# EAGLE board OOBD-Cup_v5-EuroPCB (EAGLE 5.11), part 1 of 4
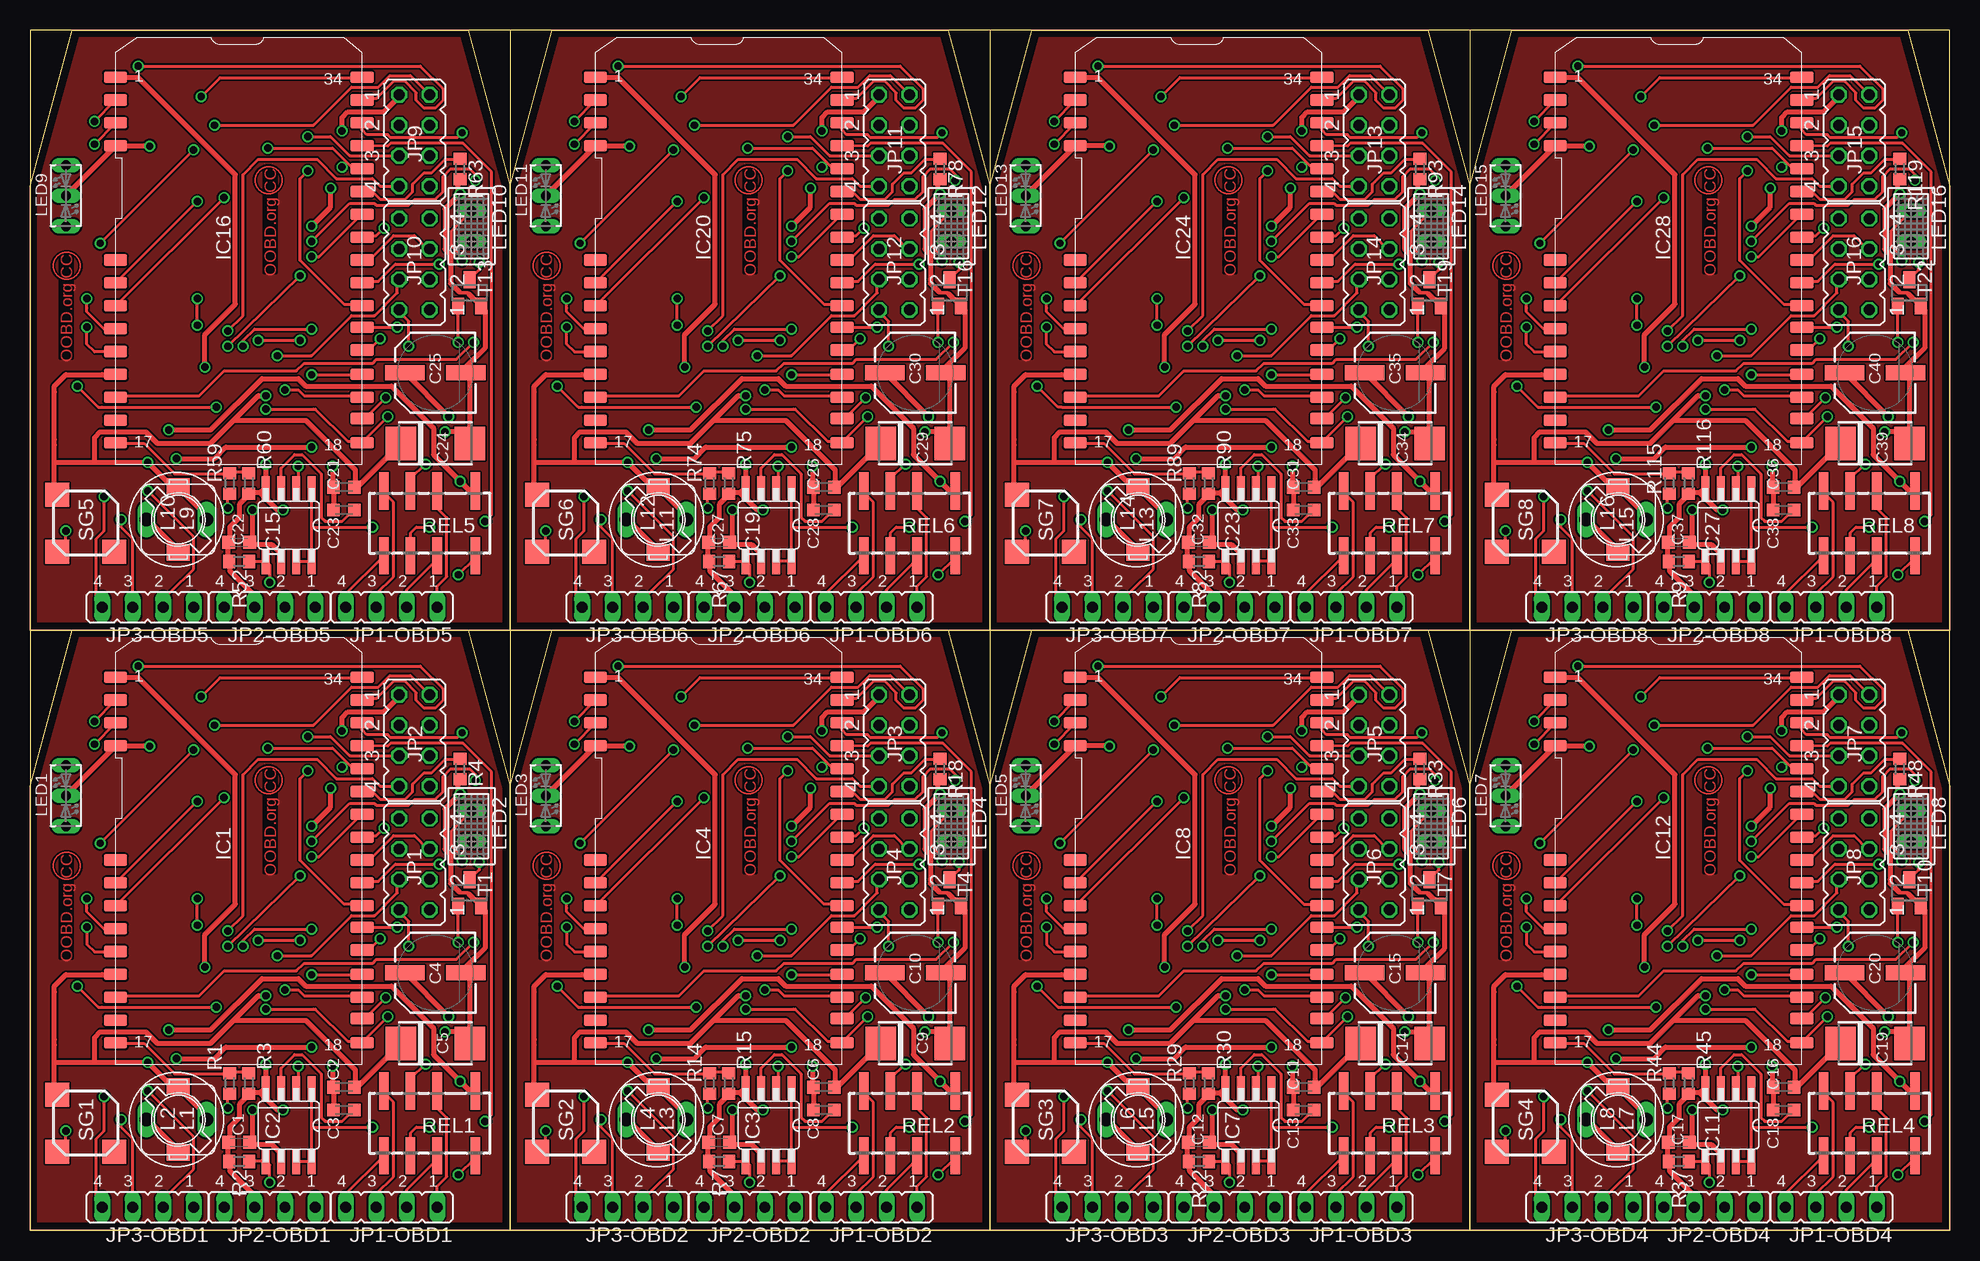
[diagram p0: board, top side]
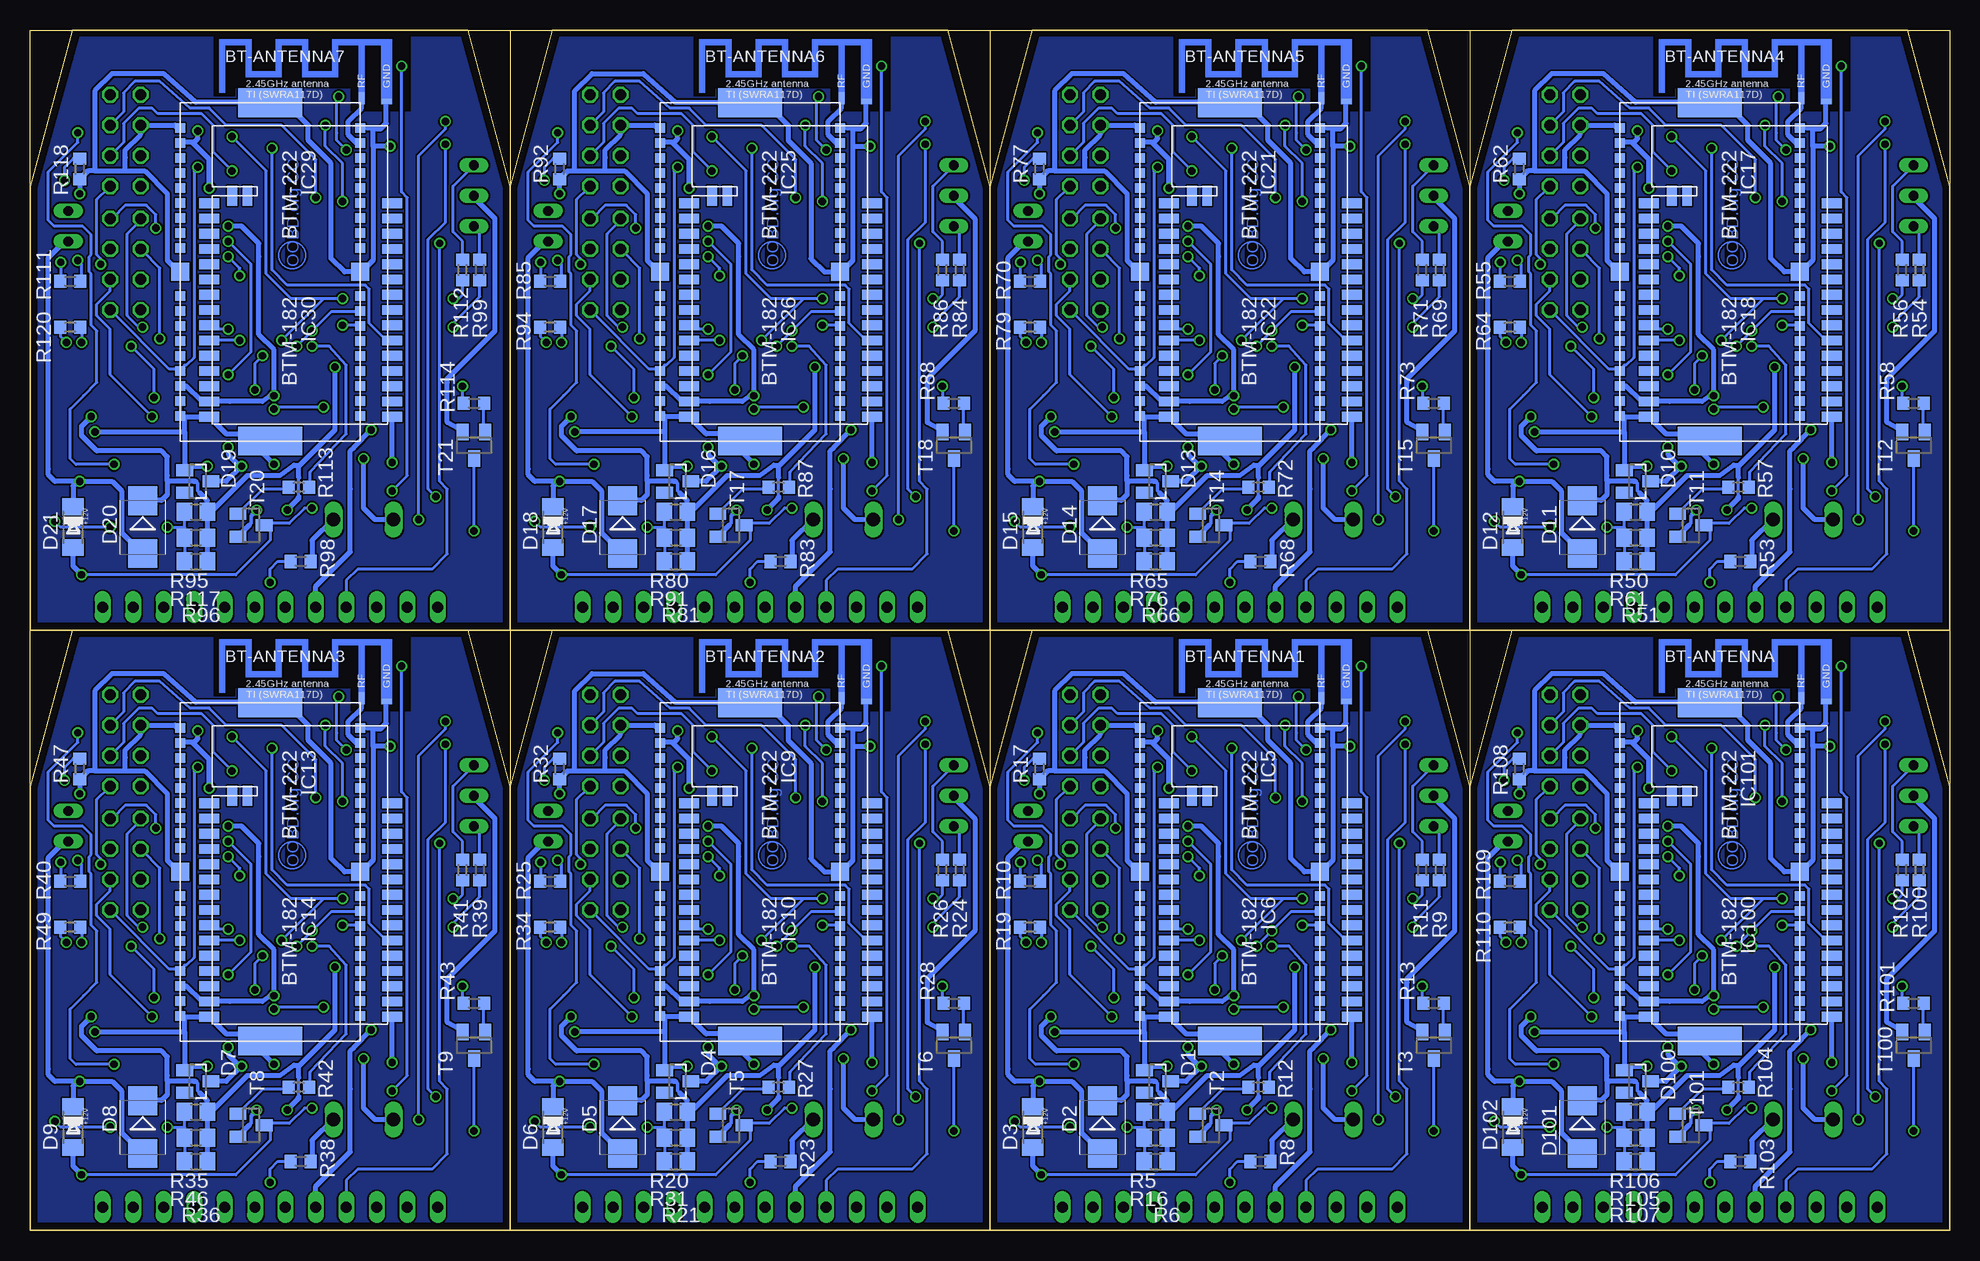
[diagram p1: board, bottom side, seen from below]

Size 160 x 100 mm. Coordinates in mm from the lower left corner, seen from the top.
Outline: 40,0 0,0
Outline: 0,0 0,37 3.5,50 36.5,50 40,37
Outline: 40,37 40,0
Outline: 80,0 40,0
Outline: 40,0 40,37
Outline: 40,37 43.5,50 76.5,50 80,37
Outline: 80,37 80,0
Outline: 120,0 80,0
Outline: 80,0 80,37
Outline: 80,37 83.5,50 116.5,50 120,37
Outline: 120,37 120,0
Outline: 160,0 120,0
Outline: 120,0 120,37
Outline: 120,37 123.5,50 156.5,50 160,37 160,0
Outline: 40,50 0,50 0,87 3.5,100 36.5,100 40,87
Outline: 40,87 40,50
Outline: 80,50 40,50
Outline: 40,50 40,87
Outline: 40,87 43.5,100 76.5,100 80,87
Outline: 80,87 80,50
Outline: 120,50 80,50
Outline: 80,50 80,87
Outline: 80,87 83.5,100 116.5,100 120,87
Outline: 120,87 120,50
Outline: 120,50 160,50 160,87 156.5,100 123.5,100 120,87
Outline: 120,50 120,87
Outline: 0,0 160,0
Outline: 160,0 160,100 0,100 0,0
Copper layers (1*16): Top 0.035mm / dielectric 1.5mm / Bottom 0.035mm
Design rules "multi-cb_035um-cu *": minimum track width 6mil, minimum drill 12mil, track to track 6mil, track to pad 6mil, pad to pad 6mil, via to via 6mil, smd to smd 6mil, copper to edge 20mil, drill to drill 8mil, minimum pad ring 8mil, minimum via ring 6mil, stop-mask expansion 3mil, vias tented up to drill 0mil, thermal gap 8mil
Milling: 16 lines

## Footprints (pad centres in the part's own frame; a part is rotated, then mirrored left to right if it is on the bottom)
SWRA117D_RIGHT = smd 0.813 x 0.406: GND -0.45,0.25 | smd 0.508 x 1.016: RF -2.55,0.5
C0603K = smd 1.05 x 1.08: 1 -0.875,0; 2 0.875,0
SV-D = smd 3.302 x 1.27: + -2.54,0; - 2.54,0
C6032-TE-C = smd 2.54 x 2.794: + 2.857,0; - -2.857,0
SOT23 = smd 1 x 1.4: 1 -0.95,-1.1; 2 0.95,-1.1; 3 0,1.1
SMB = smd 2.4 x 2.4: A 2.2,0; C -2.2,0
MINIMELF = smd 1.4 x 1.8: A 1.7,0; C -1.7,0
DMX1-MINI = smd 1.93 x 0.965: 1 0,32.258; 2 0,30.353; 3 0,28.448; 4 0,26.543; 9 0,17.018; 10 0,15.113; 11 0,13.208; 12 0,11.303; 13 0,9.398; 14 0,7.493; 15 0,5.588; 16 0,3.683; 17 0,1.778; 18 20.574,1.778; 19 20.574,3.81; 20 20.574,5.588; 21 20.574,7.493; 22 20.574,9.525; 23 20.574,11.43; 24 20.574,13.208; 25 20.574,15.113; 26 20.574,17.018; 27 20.574,18.923; 28 20.574,20.828; 29 20.574,22.733; 30 20.574,24.638; 31 20.574,26.543; 32 20.574,28.448; 33 20.574,30.353; 34 20.574,32.258
SO8 = smd 0.66 x 2.032: 1 -1.905,-3.073; 2 -0.635,-3.073; 3 0.635,-3.073; 4 1.905,-3.073; 5 1.905,3.073; 6 0.635,3.073; 7 -0.635,3.073; 8 -1.905,3.073
BTM-222 = smd 0.8 x 0.8: P$1 -12.635,-7.5; P$2 -11.385,-7.5; P$3 -10.135,-7.5; P$4 -8.885,-7.5; P$5 -7.635,-7.5; P$6 -6.385,-7.5; P$7 -5.135,-7.5; P$8 -3.885,-7.5; P$9 -2.635,-7.5; P$11 1.365,-7.5; P$12 2.615,-7.5; P$13 3.865,-7.5; P$14 5.115,-7.5; P$15 6.365,-7.5; P$16 7.615,-7.5; P$17 8.865,-7.5; P$18 10.115,-7.5; P$19 11.365,-7.5; P$20 11.365,7.5; P$21 10.115,7.5; P$22 8.865,7.5; P$23 7.615,7.5; P$24 6.365,7.5; P$25 5.115,7.5; P$26 3.865,7.5; P$27 2.615,7.5; P$28 1.365,7.5; P$30 -2.635,7.5; P$31 -3.885,7.5; P$32 -5.135,7.5; P$33 -6.385,7.5; P$34 -7.635,7.5; P$35 -8.885,7.5; P$36 -10.135,7.5; P$37 -11.385,7.5; P$38 -12.635,7.5 | smd 1.5 x 1.5: P$10 -0.635,-7.5; P$29 -0.635,7.5 | smd 2.4 x 5.3: P$AGND -14.735,0; P$BGND 13.465,0
BTM-182 = smd 1.676 x 0.813: P$1 -7.62,7.62; P$2 -7.62,6.35; P$3 -7.62,5.08; P$4 -7.62,3.81; P$5 -7.62,2.54; P$6 -7.62,1.27; P$7 -7.62,0; P$8 -7.62,-1.27; P$9 -7.62,-2.54; P$10 -7.62,-3.81; P$11 -7.62,-5.08; P$12 -7.62,-6.35; P$13 -7.62,-7.62; P$14 -7.62,-8.89; P$15 -7.62,-10.16; P$16 7.62,-10.16; P$17 7.62,-8.89; P$18 7.62,-7.62; P$19 7.62,-6.35; P$20 7.62,-5.08; P$21 7.62,-3.81; P$22 7.62,-2.54; P$23 7.62,-1.27; P$24 7.62,0; P$25 7.62,1.27; P$26 7.62,2.54; P$27 7.62,3.81; P$28 7.62,5.08; P$29 7.62,6.35; P$30 7.62,7.62 | smd 0.813 x 1.676: P$31 -4.445,8.255; P$32 -5.715,8.255
JP4Q = drill 0.914 octagon: 1 -3.81,-1.27; 2 -3.81,1.27; 3 -1.27,-1.27; 4 -1.27,1.27; 5 1.27,-1.27; 6 1.27,1.27; 7 3.81,-1.27; 8 3.81,1.27
JP4 = drill 0.914 long: 1 -3.81,0; 2 -1.27,0; 3 1.27,0; 4 3.81,0
07HCP-XXXX-50 = drill 1.1 long: 1 -2.5,0; 2 2.5,0
PIS2408 = smd 1.9 x 1.4: P$1 0,2.75; P$2 0,-2.75
DUOLED2X5 = drill 0.813 long: AG -2.54,0; AR 2.54,0; K 0,0
U57X32 = drill 0.813 long: A -1.27,0; K 1.27,0
R0603 = smd 1 x 1.1: 1 -0.85,0; 2 0.85,0
R0805 = smd 1.3 x 1.5: 1 -0.95,0; 2 0.95,0
FTR-B4GA = smd 0.8 x 3.1: 1 -3.8,-3.167; 2 -0.625,-3.167; 3 1.597,-3.167; 4 3.82,-3.167; 5 3.82,2.23; 6 1.597,2.23; 7 -0.625,2.23; 8 -3.8,2.23
BME0603SA = smd 2 x 2: (+)LEAD 4.295,0.425; (-)LEAD -0.475,0.425; NC -0.475,-4.345

## Placement (x,y rotation side)
BT-ANTENNA  [SWRA117D_RIGHT]  9.82,43.82 0 bottom
BT-ANTENNA1  [SWRA117D_RIGHT]  49.82,43.82 0 bottom
BT-ANTENNA2  [SWRA117D_RIGHT]  89.82,43.82 0 bottom
BT-ANTENNA3  [SWRA117D_RIGHT]  129.82,43.82 0 bottom
BT-ANTENNA4  [SWRA117D_RIGHT]  9.82,93.81 0 bottom
BT-ANTENNA5  [SWRA117D_RIGHT]  49.82,93.81 0 bottom
BT-ANTENNA6  [SWRA117D_RIGHT]  89.82,93.81 0 bottom
BT-ANTENNA7  [SWRA117D_RIGHT]  129.82,93.81 0 bottom
C1  100nF  [C0603K]  17.44,7.3 180 top
C2  1µF  [C0603K]  26.17,11.91 180 top
C3  270pF  [C0603K]  26.17,10 180 top
C4  47µ/35V  [SV-D]  33.79,21.43 0 top
C5  220µF  [C6032-TE-C]  33.79,15.56 180 top
C6  1µF  [C0603K]  66.17,11.91 180 top
C7  100nF  [C0603K]  57.44,7.3 180 top
C8  270pF  [C0603K]  66.17,10 180 top
C9  220µF  [C6032-TE-C]  73.79,15.56 180 top
C10  47µ/35V  [SV-D]  73.79,21.43 0 top
C11  1µF  [C0603K]  106.17,11.91 180 top
C12  100nF  [C0603K]  97.44,7.3 180 top
C13  270pF  [C0603K]  106.17,10 180 top
C14  220µF  [C6032-TE-C]  113.79,15.56 180 top
C15  47µ/35V  [SV-D]  113.79,21.43 0 top
C16  1µF  [C0603K]  146.17,11.91 180 top
C17  100nF  [C0603K]  137.44,7.3 180 top
C18  270pF  [C0603K]  146.17,10 180 top
C19  220µF  [C6032-TE-C]  153.79,15.56 180 top
C20  47µ/35V  [SV-D]  153.79,21.43 0 top
C21  1µF  [C0603K]  26.17,61.91 180 top
C22  100nF  [C0603K]  17.44,57.3 180 top
C23  270pF  [C0603K]  26.17,60 180 top
C24  220µF  [C6032-TE-C]  33.79,65.56 180 top
C25  47µ/35V  [SV-D]  33.79,71.43 0 top
C26  1µF  [C0603K]  66.17,61.91 180 top
C27  100nF  [C0603K]  57.44,57.3 180 top
C28  270pF  [C0603K]  66.17,60 180 top
C29  220µF  [C6032-TE-C]  73.79,65.56 180 top
C30  47µ/35V  [SV-D]  73.79,71.43 0 top
C31  1µF  [C0603K]  106.17,61.91 180 top
C32  100nF  [C0603K]  97.44,57.3 180 top
C33  270pF  [C0603K]  106.17,60 180 top
C34  220µF  [C6032-TE-C]  113.79,65.56 180 top
C35  47µ/35V  [SV-D]  113.79,71.43 0 top
C36  1µF  [C0603K]  146.17,61.91 180 top
C37  100nF  [C0603K]  137.44,57.3 180 top
C38  270pF  [C0603K]  146.17,60 180 top
C39  220µF  [C6032-TE-C]  153.79,65.56 180 top
C40  47µ/35V  [SV-D]  153.79,71.43 0 top
D1  BAS40  [SOT23]  66.01,12.38 270 bottom
D2  B140  [SMB]  70.62,8.57 270 bottom
D3  1N4148  [MINIMELF]  76.41,8.57 270 bottom
D4  BAS40  [SOT23]  106.01,12.38 270 bottom
D5  B140  [SMB]  110.62,8.57 270 bottom
D6  1N4148  [MINIMELF]  116.41,8.57 270 bottom
D7  BAS40  [SOT23]  146.01,12.38 270 bottom
D8  B140  [SMB]  150.62,8.57 270 bottom
D9  1N4148  [MINIMELF]  156.41,8.57 270 bottom
D10  BAS40  [SOT23]  26.01,62.38 270 bottom
D11  B140  [SMB]  30.62,58.57 270 bottom
D12  1N4148  [MINIMELF]  36.41,58.57 270 bottom
D13  BAS40  [SOT23]  66.01,62.38 270 bottom
D14  B140  [SMB]  70.62,58.57 270 bottom
D15  1N4148  [MINIMELF]  76.41,58.57 270 bottom
D16  BAS40  [SOT23]  106.01,62.38 270 bottom
D17  B140  [SMB]  110.62,58.57 270 bottom
D18  1N4148  [MINIMELF]  116.41,58.57 270 bottom
D19  BAS40  [SOT23]  146.01,62.38 270 bottom
D20  B140  [SMB]  150.62,58.57 270 bottom
D21  1N4148  [MINIMELF]  156.41,58.57 270 bottom
D100  BAS40  [SOT23]  26.01,12.38 270 bottom
D101  B140  [SMB]  30.62,8.57 270 bottom
D102  1N4148  [MINIMELF]  36.41,8.57 270 bottom
IC1  DXM1  [DMX1-MINI]  7.12,13.81 0 top
IC2  MC34063-SO  [SO8]  21.57,8.73 180 top
IC3  MC34063-SO  [SO8]  61.57,8.73 180 top
IC4  DXM1  [DMX1-MINI]  47.12,13.81 0 top
IC5  BTM-222  [BTM-222]  59.98,29.21 270 bottom
IC6  BTM-182  [BTM-182]  57.44,27.94 0 bottom
IC7  MC34063-SO  [SO8]  101.57,8.73 180 top
IC8  DXM1  [DMX1-MINI]  87.12,13.81 0 top
IC9  BTM-222  [BTM-222]  99.98,29.21 270 bottom
IC10  BTM-182  [BTM-182]  97.44,27.94 0 bottom
IC11  MC34063-SO  [SO8]  141.57,8.73 180 top
IC12  DXM1  [DMX1-MINI]  127.12,13.81 0 top
IC13  BTM-222  [BTM-222]  139.98,29.21 270 bottom
IC14  BTM-182  [BTM-182]  137.44,27.94 0 bottom
IC15  MC34063-SO  [SO8]  21.57,58.73 180 top
IC16  DXM1  [DMX1-MINI]  7.12,63.81 0 top
IC17  BTM-222  [BTM-222]  19.98,79.21 270 bottom
IC18  BTM-182  [BTM-182]  17.44,77.94 0 bottom
IC19  MC34063-SO  [SO8]  61.57,58.73 180 top
IC20  DXM1  [DMX1-MINI]  47.12,63.81 0 top
IC21  BTM-222  [BTM-222]  59.98,79.21 270 bottom
IC22  BTM-182  [BTM-182]  57.44,77.94 0 bottom
IC23  MC34063-SO  [SO8]  101.57,58.73 180 top
IC24  DXM1  [DMX1-MINI]  87.12,63.81 0 top
IC25  BTM-222  [BTM-222]  99.98,79.21 270 bottom
IC26  BTM-182  [BTM-182]  97.44,77.94 0 bottom
IC27  MC34063-SO  [SO8]  141.57,58.73 180 top
IC28  DXM1  [DMX1-MINI]  127.12,63.81 0 top
IC29  BTM-222  [BTM-222]  139.98,79.21 270 bottom
IC30  BTM-182  [BTM-182]  137.44,77.94 0 bottom
IC100  BTM-182  [BTM-182]  17.44,27.94 0 bottom
IC101  BTM-222  [BTM-222]  19.98,29.21 270 bottom
JP1  SPI / SD-Card  [JP4Q]  32.05,30.48 90 top
JP1-OBD1  [JP4]  30.14,1.91 180 top
JP1-OBD2  [JP4]  70.14,1.91 180 top
JP1-OBD3  [JP4]  110.14,1.91 180 top
JP1-OBD4  [JP4]  150.14,1.91 180 top
JP1-OBD5  [JP4]  30.14,51.91 180 top
JP1-OBD6  [JP4]  70.14,51.91 180 top
JP1-OBD7  [JP4]  110.14,51.91 180 top
JP1-OBD8  [JP4]  150.14,51.91 180 top
JP2  Program  [JP4Q]  32.05,40.8 270 top
JP2-OBD1  [JP4]  19.98,1.91 180 top
JP2-OBD2  [JP4]  59.98,1.91 180 top
JP2-OBD3  [JP4]  99.98,1.91 180 top
JP2-OBD4  [JP4]  139.98,1.91 180 top
JP2-OBD5  [JP4]  19.98,51.91 180 top
JP2-OBD6  [JP4]  59.98,51.91 180 top
JP2-OBD7  [JP4]  99.98,51.91 180 top
JP2-OBD8  [JP4]  139.98,51.91 180 top
JP3  Program  [JP4Q]  72.05,40.8 270 top
JP3-OBD1  [JP4]  9.82,1.91 180 top
JP3-OBD2  [JP4]  49.82,1.91 180 top
JP3-OBD3  [JP4]  89.82,1.91 180 top
JP3-OBD4  [JP4]  129.82,1.91 180 top
JP3-OBD5  [JP4]  9.82,51.91 180 top
JP3-OBD6  [JP4]  49.82,51.91 180 top
JP3-OBD7  [JP4]  89.82,51.91 180 top
JP3-OBD8  [JP4]  129.82,51.91 180 top
JP4  SPI / SD-Card  [JP4Q]  72.05,30.48 90 top
JP5  Program  [JP4Q]  112.05,40.8 270 top
JP6  SPI / SD-Card  [JP4Q]  112.05,30.48 90 top
JP7  Program  [JP4Q]  152.05,40.8 270 top
JP8  SPI / SD-Card  [JP4Q]  152.05,30.48 90 top
JP9  Program  [JP4Q]  32.05,90.8 270 top
JP10  SPI / SD-Card  [JP4Q]  32.05,80.48 90 top
JP11  Program  [JP4Q]  72.05,90.8 270 top
JP12  SPI / SD-Card  [JP4Q]  72.05,80.48 90 top
JP13  Program  [JP4Q]  112.05,90.8 270 top
JP14  SPI / SD-Card  [JP4Q]  112.05,80.48 90 top
JP15  Program  [JP4Q]  152.05,90.8 270 top
JP16  SPI / SD-Card  [JP4Q]  152.05,80.48 90 top
L1  47µH  [07HCP-XXXX-50]  12.2,9.21 180 top
L2  47uH  [PIS2408]  12.36,9.21 0 top
L3  47µH  [07HCP-XXXX-50]  52.2,9.21 180 top
L4  47uH  [PIS2408]  52.36,9.21 0 top
L5  47µH  [07HCP-XXXX-50]  92.2,9.21 180 top
L6  47uH  [PIS2408]  92.36,9.21 0 top
L7  47µH  [07HCP-XXXX-50]  132.2,9.21 180 top
L8  47uH  [PIS2408]  132.36,9.21 0 top
L9  47µH  [07HCP-XXXX-50]  12.2,59.21 180 top
L10  47uH  [PIS2408]  12.36,59.21 0 top
L11  47µH  [07HCP-XXXX-50]  52.2,59.21 180 top
L12  47uH  [PIS2408]  52.36,59.21 0 top
L13  47µH  [07HCP-XXXX-50]  92.2,59.21 180 top
L14  47uH  [PIS2408]  92.36,59.21 0 top
L15  47µH  [07HCP-XXXX-50]  132.2,59.21 180 top
L16  47uH  [PIS2408]  132.36,59.21 0 top
LED1  Rt/Gr  [DUOLED2X5]  2.99,36.2 90 top
LED2  Blue  [U57X32]  36.81,33.66 90 top
LED3  Rt/Gr  [DUOLED2X5]  42.99,36.2 90 top
LED4  Blue  [U57X32]  76.81,33.66 90 top
LED5  Rt/Gr  [DUOLED2X5]  82.99,36.2 90 top
LED6  Blue  [U57X32]  116.81,33.66 90 top
LED7  Rt/Gr  [DUOLED2X5]  122.99,36.2 90 top
LED8  Blue  [U57X32]  156.81,33.66 90 top
LED9  Rt/Gr  [DUOLED2X5]  2.99,86.19 90 top
LED10  Blue  [U57X32]  36.81,83.66 90 top
LED11  Rt/Gr  [DUOLED2X5]  42.99,86.19 90 top
LED12  Blue  [U57X32]  76.81,83.66 90 top
LED13  Rt/Gr  [DUOLED2X5]  82.99,86.19 90 top
LED14  Blue  [U57X32]  116.81,83.66 90 top
LED15  Rt/Gr  [DUOLED2X5]  122.99,86.19 90 top
LED16  Blue  [U57X32]  156.81,83.66 90 top
R1  180k  [R0603]  16.65,12.22 270 top
R2  3k3  [R0603]  17.44,5.71 180 top
R3  47k  [R0603]  18.23,12.22 90 top
R4  10k  [R0603]  35.85,38.42 270 top
R5  1R  [R0805]  66.17,9.84 0 bottom
R6  1R  [R0805]  66.17,5.71 0 bottom
R7  3k3  [R0603]  57.44,5.71 180 top
R8  5k6  [R0603]  57.44,5.71 0 bottom
R9  82R  [R0603]  42.52,30 90 bottom
R10  390R  [R0603]  76.65,29.05 180 bottom
R11  82R  [R0603]  43.95,30 90 bottom
R12  4K7  [R0603]  57.6,11.91 180 bottom
R13  4K7  [R0603]  42.99,18.89 0 bottom
R14  180k  [R0603]  56.65,12.22 270 top
R15  47k  [R0603]  58.23,12.22 90 top
R16  1R  [R0805]  66.17,7.7 0 bottom
R17  10k  [R0603]  75.86,38.42 270 bottom
R18  10k  [R0603]  75.86,38.42 270 top
R19  4K7  [R0603]  76.65,25.24 0 bottom
R20  1R  [R0805]  106.17,9.84 0 bottom
R21  1R  [R0805]  106.17,5.71 0 bottom
R22  3k3  [R0603]  97.44,5.71 180 top
R23  5k6  [R0603]  97.44,5.71 0 bottom
R24  82R  [R0603]  82.52,30 90 bottom
R25  390R  [R0603]  116.65,29.05 180 bottom
R26  82R  [R0603]  83.95,30 90 bottom
R27  4K7  [R0603]  97.6,11.91 180 bottom
R28  4K7  [R0603]  82.99,18.89 0 bottom
R29  180k  [R0603]  96.65,12.22 270 top
R30  47k  [R0603]  98.23,12.22 90 top
R31  1R  [R0805]  106.17,7.7 0 bottom
R32  10k  [R0603]  115.86,38.42 270 bottom
R33  10k  [R0603]  115.86,38.42 270 top
R34  4K7  [R0603]  116.65,25.24 0 bottom
R35  1R  [R0805]  146.17,9.84 0 bottom
R36  1R  [R0805]  146.17,5.71 0 bottom
R37  3k3  [R0603]  137.44,5.71 180 top
R38  5k6  [R0603]  137.44,5.71 0 bottom
R39  82R  [R0603]  122.52,30 90 bottom
R40  390R  [R0603]  156.65,29.05 180 bottom
R41  82R  [R0603]  123.95,30 90 bottom
R42  4K7  [R0603]  137.6,11.91 180 bottom
R43  4K7  [R0603]  122.99,18.89 0 bottom
R44  180k  [R0603]  136.65,12.22 270 top
R45  47k  [R0603]  138.23,12.22 90 top
R46  1R  [R0805]  146.17,7.7 0 bottom
R47  10k  [R0603]  155.86,38.42 270 bottom
R48  10k  [R0603]  155.86,38.42 270 top
R49  4K7  [R0603]  156.65,25.24 0 bottom
R50  1R  [R0805]  26.17,59.84 0 bottom
R51  1R  [R0805]  26.17,55.72 0 bottom
R52  3k3  [R0603]  17.44,55.72 180 top
R53  5k6  [R0603]  17.44,55.72 0 bottom
R54  82R  [R0603]  2.52,80 90 bottom
R55  390R  [R0603]  36.65,79.05 180 bottom
R56  82R  [R0603]  3.95,80 90 bottom
R57  4K7  [R0603]  17.6,61.91 180 bottom
R58  4K7  [R0603]  2.99,68.89 0 bottom
R59  180k  [R0603]  16.65,62.22 270 top
R60  47k  [R0603]  18.23,62.22 90 top
R61  1R  [R0805]  26.17,57.7 0 bottom
R62  10k  [R0603]  35.85,88.42 270 bottom
R63  10k  [R0603]  35.85,88.42 270 top
R64  4K7  [R0603]  36.65,75.24 0 bottom
R65  1R  [R0805]  66.17,59.84 0 bottom
R66  1R  [R0805]  66.17,55.72 0 bottom
R67  3k3  [R0603]  57.44,55.72 180 top
R68  5k6  [R0603]  57.44,55.72 0 bottom
R69  82R  [R0603]  42.52,80 90 bottom
R70  390R  [R0603]  76.65,79.05 180 bottom
R71  82R  [R0603]  43.95,80 90 bottom
R72  4K7  [R0603]  57.6,61.91 180 bottom
R73  4K7  [R0603]  42.99,68.89 0 bottom
R74  180k  [R0603]  56.65,62.22 270 top
R75  47k  [R0603]  58.23,62.22 90 top
R76  1R  [R0805]  66.17,57.7 0 bottom
R77  10k  [R0603]  75.86,88.42 270 bottom
R78  10k  [R0603]  75.86,88.42 270 top
R79  4K7  [R0603]  76.65,75.24 0 bottom
R80  1R  [R0805]  106.17,59.84 0 bottom
R81  1R  [R0805]  106.17,55.72 0 bottom
R82  3k3  [R0603]  97.44,55.72 180 top
R83  5k6  [R0603]  97.44,55.72 0 bottom
R84  82R  [R0603]  82.52,80 90 bottom
R85  390R  [R0603]  116.65,79.05 180 bottom
R86  82R  [R0603]  83.95,80 90 bottom
R87  4K7  [R0603]  97.6,61.91 180 bottom
R88  4K7  [R0603]  82.99,68.89 0 bottom
R89  180k  [R0603]  96.65,62.22 270 top
R90  47k  [R0603]  98.23,62.22 90 top
R91  1R  [R0805]  106.17,57.7 0 bottom
R92  10k  [R0603]  115.86,88.42 270 bottom
R93  10k  [R0603]  115.86,88.42 270 top
R94  4K7  [R0603]  116.65,75.24 0 bottom
R95  1R  [R0805]  146.17,59.84 0 bottom
R96  1R  [R0805]  146.17,55.72 0 bottom
R97  3k3  [R0603]  137.44,55.72 180 top
R98  5k6  [R0603]  137.44,55.72 0 bottom
R99  82R  [R0603]  122.52,80 90 bottom
R100  82R  [R0603]  2.52,30 90 bottom
R101  4K7  [R0603]  2.99,18.89 0 bottom
R102  82R  [R0603]  3.95,30 90 bottom
R103  5k6  [R0603]  17.44,5.71 0 bottom
R104  4K7  [R0603]  17.6,11.91 180 bottom
R105  1R  [R0805]  26.17,7.7 0 bottom
R106  1R  [R0805]  26.17,9.84 0 bottom
R107  1R  [R0805]  26.17,5.71 0 bottom
R108  10k  [R0603]  35.85,38.42 270 bottom
R109  390R  [R0603]  36.65,29.05 180 bottom
R110  4K7  [R0603]  36.65,25.24 0 bottom
R111  390R  [R0603]  156.65,79.05 180 bottom
R112  82R  [R0603]  123.95,80 90 bottom
R113  4K7  [R0603]  137.6,61.91 180 bottom
R114  4K7  [R0603]  122.99,68.89 0 bottom
R115  180k  [R0603]  136.65,62.22 270 top
R116  47k  [R0603]  138.23,62.22 90 top
R117  1R  [R0805]  146.17,57.7 0 bottom
R118  10k  [R0603]  155.86,88.42 270 bottom
R119  10k  [R0603]  155.86,88.42 270 top
R120  4K7  [R0603]  156.65,75.24 0 bottom
REL1  FTR-B4GA  [FTR-B4GA]  33.31,8.41 180 top
REL2  FTR-B4GA  [FTR-B4GA]  73.31,8.41 180 top
REL3  FTR-B4GA  [FTR-B4GA]  113.31,8.41 180 top
REL4  FTR-B4GA  [FTR-B4GA]  153.32,8.41 180 top
REL5  FTR-B4GA  [FTR-B4GA]  33.31,58.41 180 top
REL6  FTR-B4GA  [FTR-B4GA]  73.31,58.41 180 top
REL7  FTR-B4GA  [FTR-B4GA]  113.31,58.41 180 top
REL8  FTR-B4GA  [FTR-B4GA]  153.32,58.41 180 top
SG1  MBWOE  [BME0603SA]  2.68,6.99 90 top
SG2  MBWOE  [BME0603SA]  42.68,6.99 90 top
SG3  MBWOE  [BME0603SA]  82.68,6.99 90 top
SG4  MBWOE  [BME0603SA]  122.68,6.99 90 top
SG5  MBWOE  [BME0603SA]  2.68,56.98 90 top
SG6  MBWOE  [BME0603SA]  42.68,56.98 90 top
SG7  MBWOE  [BME0603SA]  82.68,56.98 90 top
SG8  MBWOE  [BME0603SA]  122.68,56.98 90 top
T1  BC817  [SOT23]  36.65,28.1 0 top
T2  BC817  [SOT23]  61.57,8.73 270 bottom
T3  BC817  [SOT23]  42.99,15.4 180 bottom
T4  BC817  [SOT23]  76.65,28.1 0 top
T5  BC817  [SOT23]  101.57,8.73 270 bottom
T6  BC817  [SOT23]  82.99,15.4 180 bottom
T7  BC817  [SOT23]  116.65,28.1 0 top
T8  BC817  [SOT23]  141.57,8.73 270 bottom
T9  BC817  [SOT23]  122.99,15.4 180 bottom
T10  BC817  [SOT23]  156.65,28.1 0 top
T11  BC817  [SOT23]  21.57,58.73 270 bottom
T12  BC817  [SOT23]  2.99,65.4 180 bottom
T13  BC817  [SOT23]  36.65,78.1 0 top
T14  BC817  [SOT23]  61.57,58.73 270 bottom
T15  BC817  [SOT23]  42.99,65.4 180 bottom
T16  BC817  [SOT23]  76.65,78.1 0 top
T17  BC817  [SOT23]  101.57,58.73 270 bottom
T18  BC817  [SOT23]  82.99,65.4 180 bottom
T19  BC817  [SOT23]  116.65,78.1 0 top
T20  BC817  [SOT23]  141.57,58.73 270 bottom
T21  BC817  [SOT23]  122.99,65.4 180 bottom
T22  BC817  [SOT23]  156.65,78.1 0 top
T100  BC817  [SOT23]  2.99,15.4 180 bottom
T101  BC817  [SOT23]  21.57,8.73 270 bottom

## Library data of the parts
BT-ANTENNA BT-ANTENNA1-BT-ANTENNA7 = ant-planar-1
C1-C3 C6-C8 C11-C13 C16-C18 C21-C23 C26-C28 C31-C33 C36-C38 R1-R120 = rcl
C4 C10 C15 C20 C25 C30 C35 C40 = cap-master
C5 C9 C14 C19 C24 C29 C34 C39 = rc-master
D1-D21 D100-D102 = diode
IC1 IC4 IC8 IC12 IC16 IC20 IC24 IC28 = DXM
IC2 IC3 IC7 IC11 IC15 IC19 IC23 IC27 = mc34063
IC5 IC9 IC13 IC17 IC21 IC25 IC29 IC101 = btm-222
IC6 IC10 IC14 IC18 IC22 IC26 IC30 IC100 = BTM182
JP1 JP1-OBD1-JP1-OBD8 JP2 JP2-OBD1-JP2-OBD8 JP3 JP3-OBD1-JP3-OBD8 JP4-JP16 = jumper
L1-L16 = Inductor-Fastron
LED1-LED16 = led
REL1-REL8 = relay; MN: Fujitsu; MPN: FTR-B4GAxxxZ; OC_REICHELT: FTR-B4GA 12V
SG1-SG8 = buzzer; MF: Grewus
T1-T22 T100 T101 = transistor

## Nets
3V3OUT: IC1.9
3V3OUT1: IC4.9
3V3OUT2: IC8.9
3V3OUT3: IC12.9
3V3OUT4: IC16.9
3V3OUT5: IC20.9
3V3OUT6: IC24.9
3V3OUT7: IC28.9
12V_DOUT: C1.1 C4.+ D101.C IC1.1 IC2.6 R105.2 R106.2 R107.2
12V_DOUT1: C7.1 C10.+ D2.C IC3.6 IC4.1 R5.2 R6.2 R16.2
12V_DOUT2: C12.1 C15.+ D5.C IC7.6 IC8.1 R20.2 R21.2 R31.2
12V_DOUT3: C17.1 C20.+ D8.C IC11.6 IC12.1 R35.2 R36.2 R46.2
12V_DOUT4: C22.1 C25.+ D11.C IC15.6 IC16.1 R50.2 R51.2 R61.2
12V_DOUT5: C27.1 C30.+ D14.C IC19.6 IC20.1 R65.2 R66.2 R76.2
12V_DOUT6: C32.1 C35.+ D17.C IC23.6 IC24.1 R80.2 R81.2 R91.2
12V_DOUT7: C37.1 C40.+ D20.C IC27.6 IC28.1 R95.2 R96.2 R117.2
+3V1: C6.1 C9.+ IC4.14 IC5.P$2 IC5.P$17 IC6.P$14 IC6.P$16 JP3.1 L3.1 L4.P$1 R8.2 SG2.(+)LEAD
+3V2: C11.1 C14.+ IC8.14 IC9.P$2 IC9.P$17 IC10.P$14 IC10.P$16 JP5.1 L5.1 L6.P$1 R23.2 SG3.(+)LEAD
+3V3: C2.1 C5.+ IC1.14 IC100.P$14 IC100.P$16 IC101.P$2 IC101.P$17 JP2.1 L1.1 L2.P$1 R103.2 SG1.(+)LEAD
+3V4: C16.1 C19.+ IC12.14 IC13.P$2 IC13.P$17 IC14.P$14 IC14.P$16 JP7.1 L7.1 L8.P$1 R38.2 SG4.(+)LEAD
+3V5: C21.1 C24.+ IC16.14 IC17.P$2 IC17.P$17 IC18.P$14 IC18.P$16 JP9.1 L9.1 L10.P$1 R53.2 SG5.(+)LEAD
+3V6: C26.1 C29.+ IC20.14 IC21.P$2 IC21.P$17 IC22.P$14 IC22.P$16 JP11.1 L11.1 L12.P$1 R68.2 SG6.(+)LEAD
+3V7: C31.1 C34.+ IC24.14 IC25.P$2 IC25.P$17 IC26.P$14 IC26.P$16 JP13.1 L13.1 L14.P$1 R83.2 SG7.(+)LEAD
+3V8: C36.1 C39.+ IC28.14 IC29.P$2 IC29.P$17 IC30.P$14 IC30.P$16 JP15.1 L15.1 L16.P$1 R98.2 SG8.(+)LEAD
+12V: D101.A D102.C JP2-OBD1.4 LED2.A REL1.1
+12V1: D2.A D3.C JP2-OBD2.4 LED4.A REL2.1
+12V2: D5.A D6.C JP2-OBD3.4 LED6.A REL3.1
+12V3: D8.A D9.C JP2-OBD4.4 LED8.A REL4.1
+12V4: D11.A D12.C JP2-OBD5.4 LED10.A REL5.1
+12V5: D14.A D15.C JP2-OBD6.4 LED12.A REL6.1
+12V6: D17.A D18.C JP2-OBD7.4 LED14.A REL7.1
+12V7: D20.A D21.C JP2-OBD8.4 LED16.A REL8.1
A0: IC1.18 JP1.3 R101.1
A1: IC4.18 JP4.3 R13.1
A2: IC8.18 JP6.3 R28.1
A3: IC12.18 JP8.3 R43.1
A4: IC16.18 JP10.3 R58.1
A5: IC20.18 JP12.3 R73.1
A6: IC24.18 JP14.3 R88.1
A7: IC28.18 JP16.3 R114.1
BOOT0: IC1.10 JP2.2
BOOT1: IC4.10 JP3.2
BOOT2: IC8.10 JP5.2
BOOT3: IC12.10 JP7.2
BOOT4: IC16.10 JP9.2
BOOT5: IC20.10 JP11.2
BOOT6: IC24.10 JP13.2
BOOT7: IC28.10 JP15.2
CS: IC1.19 JP1.2
CS1: IC4.19 JP4.2
CS2: IC8.19 JP6.2
CS3: IC12.19 JP8.2
CS4: IC16.19 JP10.2
CS5: IC20.19 JP12.2
CS6: IC24.19 JP14.2
CS7: IC28.19 JP16.2
CTS: IC1.26 JP1.5
CTS1: IC4.26 JP4.5
CTS2: IC8.26 JP6.5
CTS3: IC12.26 JP8.5
CTS4: IC16.26 JP10.5
CTS5: IC20.26 JP12.5
CTS6: IC24.26 JP14.5
CTS7: IC28.26 JP16.5
GND: BT-ANTENNA.GND C1.2 C2.2 C3.2 C4.- C5.- D100.1 IC1.4 IC2.4 IC100.P$15 IC101.P$1 IC101.P$10 IC101.P$18 IC101.P$19 IC101.P$29 IC101.P$38 IC101.P$AGND IC101.P$BGND JP2-OBD1.3 JP2.3 LED1.K R2.2 R3.1 R4.2 R108.2 T1.2 T100.2 T101.2
GND1: BT-ANTENNA1.GND C6.2 C7.2 C8.2 C9.- C10.- D1.1 IC3.4 IC4.4 IC5.P$1 IC5.P$10 IC5.P$18 IC5.P$19 IC5.P$29 IC5.P$38 IC5.P$AGND IC5.P$BGND IC6.P$15 JP2-OBD2.3 JP3.3 LED3.K R7.2 R15.1 R17.2 R18.2 T2.2 T3.2 T4.2
GND2: BT-ANTENNA2.GND C11.2 C12.2 C13.2 C14.- C15.- D4.1 IC7.4 IC8.4 IC9.P$1 IC9.P$10 IC9.P$18 IC9.P$19 IC9.P$29 IC9.P$38 IC9.P$AGND IC9.P$BGND IC10.P$15 JP2-OBD3.3 JP5.3 LED5.K R22.2 R30.1 R32.2 R33.2 T5.2 T6.2 T7.2
GND3: BT-ANTENNA3.GND C16.2 C17.2 C18.2 C19.- C20.- D7.1 IC11.4 IC12.4 IC13.P$1 IC13.P$10 IC13.P$18 IC13.P$19 IC13.P$29 IC13.P$38 IC13.P$AGND IC13.P$BGND IC14.P$15 JP2-OBD4.3 JP7.3 LED7.K R37.2 R45.1 R47.2 R48.2 T8.2 T9.2 T10.2
GND4: BT-ANTENNA4.GND C21.2 C22.2 C23.2 C24.- C25.- D10.1 IC15.4 IC16.4 IC17.P$1 IC17.P$10 IC17.P$18 IC17.P$19 IC17.P$29 IC17.P$38 IC17.P$AGND IC17.P$BGND IC18.P$15 JP2-OBD5.3 JP9.3 LED9.K R52.2 R60.1 R62.2 R63.2 T11.2 T12.2 T13.2
GND5: BT-ANTENNA5.GND C26.2 C27.2 C28.2 C29.- C30.- D13.1 IC19.4 IC20.4 IC21.P$1 IC21.P$10 IC21.P$18 IC21.P$19 IC21.P$29 IC21.P$38 IC21.P$AGND IC21.P$BGND IC22.P$15 JP2-OBD6.3 JP11.3 LED11.K R67.2 R75.1 R77.2 R78.2 T14.2 T15.2 T16.2
GND6: BT-ANTENNA6.GND C31.2 C32.2 C33.2 C34.- C35.- D16.1 IC23.4 IC24.4 IC25.P$1 IC25.P$10 IC25.P$18 IC25.P$19 IC25.P$29 IC25.P$38 IC25.P$AGND IC25.P$BGND IC26.P$15 JP2-OBD7.3 JP13.3 LED13.K R82.2 R90.1 R92.2 R93.2 T17.2 T18.2 T19.2
GND7: BT-ANTENNA7.GND C36.2 C37.2 C38.2 C39.- C40.- D19.1 IC27.4 IC28.4 IC29.P$1 IC29.P$10 IC29.P$18 IC29.P$19 IC29.P$29 IC29.P$38 IC29.P$AGND IC29.P$BGND IC30.P$15 JP2-OBD8.3 JP15.3 LED15.K R97.2 R116.1 R118.2 R119.2 T20.2 T21.2 T22.2
HS_CAN-H: JP1-OBD1.1 REL1.2
HS_CAN-H1: JP1-OBD2.1 REL2.2
HS_CAN-H2: JP1-OBD3.1 REL3.2
HS_CAN-H3: JP1-OBD4.1 REL4.2
HS_CAN-H4: JP1-OBD5.1 REL5.2
HS_CAN-H5: JP1-OBD6.1 REL6.2
HS_CAN-H6: JP1-OBD7.1 REL7.2
HS_CAN-H7: JP1-OBD8.1 REL8.2
HS_CAN-L: JP1-OBD1.2 REL1.7
HS_CAN-L1: JP1-OBD2.2 REL2.7
HS_CAN-L2: JP1-OBD3.2 REL3.7
HS_CAN-L3: JP1-OBD4.2 REL4.7
HS_CAN-L4: JP1-OBD5.2 REL5.7
HS_CAN-L5: JP1-OBD6.2 REL6.7
HS_CAN-L6: JP1-OBD7.2 REL7.7
HS_CAN-L7: JP1-OBD8.2 REL8.7
K-LINE: IC1.33 JP3-OBD1.2
K-LINE1: IC4.33 JP3-OBD2.2
K-LINE2: IC8.33 JP3-OBD3.2
K-LINE3: IC12.33 JP3-OBD4.2
K-LINE4: IC16.33 JP3-OBD5.2
K-LINE5: IC20.33 JP3-OBD6.2
K-LINE6: IC24.33 JP3-OBD7.2
K-LINE7: IC28.33 JP3-OBD8.2
L-LINE: IC1.34 JP3-OBD1.1
L-LINE1: IC4.34 JP3-OBD2.1
L-LINE2: IC8.34 JP3-OBD3.1
L-LINE3: IC12.34 JP3-OBD4.1
L-LINE4: IC16.34 JP3-OBD5.1
L-LINE5: IC20.34 JP3-OBD6.1
L-LINE6: IC24.34 JP3-OBD7.1
L-LINE7: IC28.34 JP3-OBD8.1
LED1: IC1.12 R102.1
LED2: IC1.13 R100.1
LED3: IC4.12 R11.1
LED4: IC4.13 R9.1
LED5: IC8.12 R26.1
LED6: IC8.13 R24.1
LED7: IC12.12 R41.1
LED8: IC12.13 R39.1
LED9: IC16.12 R56.1
LED10: IC16.13 R54.1
LED11: IC20.12 R71.1
LED12: IC20.13 R69.1
LED13: IC24.12 R86.1
LED14: IC24.13 R84.1
LED15: IC28.12 R112.1
LED16: IC28.13 R99.1
MISO: IC1.22 JP1.6
MISO1: IC4.22 JP4.6
MISO2: IC8.22 JP6.6
MISO3: IC12.22 JP8.6
MISO4: IC16.22 JP10.6
MISO5: IC20.22 JP12.6
MISO6: IC24.22 JP14.6
MISO7: IC28.22 JP16.6
MODE1: IC1.29 R4.1
MODE2: IC1.28 R104.1
MODE3: IC4.28 R12.1
MODE4: IC4.29 R18.1
MODE5: IC8.28 R27.1
MODE6: IC8.29 R33.1
MODE7: IC12.28 R42.1
MODE8: IC12.29 R48.1
MODE9: IC16.28 R57.1
MODE10: IC16.29 R63.1
MODE11: IC20.28 R72.1
MODE12: IC20.29 R78.1
MODE13: IC24.28 R87.1
MODE14: IC24.29 R93.1
MODE15: IC28.28 R113.1
MODE16: IC28.29 R119.1
MOSI: IC1.23 JP1.8
MOSI1: IC4.23 JP4.8
MOSI2: IC8.23 JP6.8
MOSI3: IC12.23 JP8.8
MOSI4: IC16.23 JP10.8
MOSI5: IC20.23 JP12.8
MOSI6: IC24.23 JP14.8
MOSI7: IC28.23 JP16.8
MS_CAN-H: JP1-OBD1.3 REL1.4
MS_CAN-H1: JP1-OBD2.3 REL2.4
MS_CAN-H2: JP1-OBD3.3 REL3.4
MS_CAN-H3: JP1-OBD4.3 REL4.4
MS_CAN-H4: JP1-OBD5.3 REL5.4
MS_CAN-H5: JP1-OBD6.3 REL6.4
MS_CAN-H6: JP1-OBD7.3 REL7.4
MS_CAN-H7: JP1-OBD8.3 REL8.4
MS_CAN-L: JP1-OBD1.4 REL1.5
MS_CAN-L1: JP1-OBD2.4 REL2.5
MS_CAN-L2: JP1-OBD3.4 REL3.5
MS_CAN-L3: JP1-OBD4.4 REL4.5
MS_CAN-L4: JP1-OBD5.4 REL5.5
MS_CAN-L5: JP1-OBD6.4 REL6.5
MS_CAN-L6: JP1-OBD7.4 REL7.5
MS_CAN-L7: JP1-OBD8.4 REL8.5
N$1: IC2.5 R2.1 R103.1
N$2: C3.1 IC2.3
N$3: IC1.21 R108.1
N$4: LED1.AR R102.2
N$5: IC2.1 IC2.7 IC2.8 R105.1 R106.1 R107.1
N$6: LED1.AG R100.2
N$7: LED2.K R109.1
N$8: IC1.15 R110.1
N$9: R110.2 T1.1
N$10: R109.2 T1.3
N$13: C8.1 IC3.3
N$14: IC3.1 IC3.7 IC3.8 R5.1 R6.1 R16.1
N$15: IC3.5 R7.1 R8.1
N$16: LED3.AR R11.2
N$17: LED3.AG R9.2
N$18: LED4.K R10.1
N$19: IC1.17 R1.1 R3.2
N$20: R104.2 T101.1
N$21: IC1.32 REL1.3
N$22: IC1.31 REL1.6
N$23: SG1.(-)LEAD T100.3
N$24: R101.2 T100.1
N$25: IC4.15 R19.1
N$26: IC4.17 R14.1 R15.2
N$27: D102.A R1.2 REL1.8 T101.3
N$28: R12.2 T2.1
N$29: D100.3 IC2.2 L1.2 L2.P$2
N$30: IC4.32 REL2.3
N$31: IC4.31 REL2.6
N$32: SG2.(-)LEAD T3.3
N$33: R13.2 T3.1
N$34: D3.A R14.2 REL2.8 T2.3
N$35: D1.3 IC3.2 L3.2 L4.P$2
N$36: R19.2 T4.1
N$37: R10.2 T4.3
N$38: IC4.21 R17.1
N$41: C13.1 IC7.3
N$42: IC7.1 IC7.7 IC7.8 R20.1 R21.1 R31.1
N$43: IC7.5 R22.1 R23.1
N$44: LED5.AR R26.2
N$45: LED5.AG R24.2
N$46: LED6.K R25.1
N$47: IC8.15 R34.1
N$48: IC8.17 R29.1 R30.2
N$49: R27.2 T5.1
N$50: IC8.32 REL3.3
N$51: IC8.31 REL3.6
N$52: SG3.(-)LEAD T6.3
N$53: R28.2 T6.1
N$54: D6.A R29.2 REL3.8 T5.3
N$55: D4.3 IC7.2 L5.2 L6.P$2
N$56: R34.2 T7.1
N$57: R25.2 T7.3
N$58: IC8.21 R32.1
N$61: C18.1 IC11.3
N$62: IC11.1 IC11.7 IC11.8 R35.1 R36.1 R46.1
N$63: IC11.5 R37.1 R38.1
N$64: LED7.AR R41.2
N$65: LED7.AG R39.2
N$66: LED8.K R40.1
N$67: IC12.15 R49.1
N$68: IC12.17 R44.1 R45.2
N$69: R42.2 T8.1
N$70: IC12.32 REL4.3
N$71: IC12.31 REL4.6
N$72: SG4.(-)LEAD T9.3
N$73: R43.2 T9.1
N$74: D9.A R44.2 REL4.8 T8.3
N$75: D7.3 IC11.2 L7.2 L8.P$2
N$76: R49.2 T10.1
N$77: R40.2 T10.3
N$78: IC12.21 R47.1
N$81: C23.1 IC15.3
N$82: IC15.1 IC15.7 IC15.8 R50.1 R51.1 R61.1
N$83: IC15.5 R52.1 R53.1
N$84: LED9.AR R56.2
N$85: LED9.AG R54.2
N$86: LED10.K R55.1
N$87: IC16.15 R64.1
N$88: IC16.17 R59.1 R60.2
N$89: R57.2 T11.1
N$90: IC16.32 REL5.3
N$91: IC16.31 REL5.6
N$92: SG5.(-)LEAD T12.3
N$93: R58.2 T12.1
N$94: D12.A R59.2 REL5.8 T11.3
N$95: D10.3 IC15.2 L9.2 L10.P$2
N$96: R64.2 T13.1
N$97: R55.2 T13.3
N$98: IC16.21 R62.1
N$101: C28.1 IC19.3
N$102: IC19.1 IC19.7 IC19.8 R65.1 R66.1 R76.1
N$103: IC19.5 R67.1 R68.1
N$104: LED11.AR R71.2
N$105: LED11.AG R69.2
N$106: LED12.K R70.1
N$107: IC20.15 R79.1
N$108: IC20.17 R74.1 R75.2
N$109: R72.2 T14.1
N$110: IC20.32 REL6.3
N$111: IC20.31 REL6.6
N$112: SG6.(-)LEAD T15.3
N$113: R73.2 T15.1
N$114: D15.A R74.2 REL6.8 T14.3
N$115: D13.3 IC19.2 L11.2 L12.P$2
N$116: R79.2 T16.1
N$117: R70.2 T16.3
N$118: IC20.21 R77.1
N$121: C33.1 IC23.3
N$122: IC23.1 IC23.7 IC23.8 R80.1 R81.1 R91.1
N$123: IC23.5 R82.1 R83.1
N$124: LED13.AR R86.2
N$125: LED13.AG R84.2
N$126: LED14.K R85.1
N$127: IC24.15 R94.1
N$128: IC24.17 R89.1 R90.2
N$129: R87.2 T17.1
N$130: IC24.32 REL7.3
N$131: IC24.31 REL7.6
N$132: SG7.(-)LEAD T18.3
N$133: R88.2 T18.1
N$134: D18.A R89.2 REL7.8 T17.3
N$135: D16.3 IC23.2 L13.2 L14.P$2
N$136: R94.2 T19.1
N$137: R85.2 T19.3
N$138: IC24.21 R92.1
N$141: C38.1 IC27.3
N$142: IC27.1 IC27.7 IC27.8 R95.1 R96.1 R117.1
N$143: IC27.5 R97.1 R98.1
N$144: LED15.AR R112.2
N$145: LED15.AG R99.2
N$146: LED16.K R111.1
N$147: IC28.15 R120.1
N$148: IC28.17 R115.1 R116.2
N$149: R113.2 T20.1
N$150: IC28.32 REL8.3
N$151: IC28.31 REL8.6
N$152: SG8.(-)LEAD T21.3
N$153: R114.2 T21.1
N$154: D21.A R115.2 REL8.8 T20.3
N$155: D19.3 IC27.2 L15.2 L16.P$2
N$156: R120.2 T22.1
N$157: R111.2 T22.3
N$158: IC28.21 R118.1
PWM+: IC1.2 JP3-OBD1.3
PWM+1: IC4.2 JP3-OBD2.3
PWM+2: IC8.2 JP3-OBD3.3
PWM+3: IC12.2 JP3-OBD4.3
PWM+4: IC16.2 JP3-OBD5.3
PWM+5: IC20.2 JP3-OBD6.3
PWM+6: IC24.2 JP3-OBD7.3
PWM+7: IC28.2 JP3-OBD8.3
PWM-: IC1.3 JP3-OBD1.4
PWM-1: IC4.3 JP3-OBD2.4
PWM-2: IC8.3 JP3-OBD3.4
PWM-3: IC12.3 JP3-OBD4.4
PWM-4: IC16.3 JP3-OBD5.4
PWM-5: IC20.3 JP3-OBD6.4
PWM-6: IC24.3 JP3-OBD7.4
PWM-7: IC28.3 JP3-OBD8.4
RESET-: IC1.30 IC100.P$21 IC101.P$16 JP1.1
RESET-1: IC4.30 IC5.P$16 IC6.P$21 JP4.1
RESET-2: IC8.30 IC9.P$16 IC10.P$21 JP6.1
RESET-3: IC12.30 IC13.P$16 IC14.P$21 JP8.1
RESET-4: IC16.30 IC17.P$16 IC18.P$21 JP10.1
RESET-5: IC20.30 IC21.P$16 IC22.P$21 JP12.1
RESET-6: IC24.30 IC25.P$16 IC26.P$21 JP14.1
RESET-7: IC28.30 IC29.P$16 IC30.P$21 JP16.1
RESETN: IC1.11 JP2.4
RESETN1: IC4.11 JP3.4
RESETN2: IC8.11 JP5.4
RESETN3: IC12.11 JP7.4
RESETN4: IC16.11 JP9.4
RESETN5: IC20.11 JP11.4
RESETN6: IC24.11 JP13.4
RESETN7: IC28.11 JP15.4
RF: BT-ANTENNA.RF IC101.P$37
RF1: BT-ANTENNA1.RF IC5.P$37
RF2: BT-ANTENNA2.RF IC9.P$37
RF3: BT-ANTENNA3.RF IC13.P$37
RF4: BT-ANTENNA4.RF IC17.P$37
RF5: BT-ANTENNA5.RF IC21.P$37
RF6: BT-ANTENNA6.RF IC25.P$37
RF7: BT-ANTENNA7.RF IC29.P$37
RTS: IC1.27 JP1.7
RTS1: IC4.27 JP4.7
RTS2: IC8.27 JP6.7
RTS3: IC12.27 JP8.7
RTS4: IC16.27 JP10.7
RTS5: IC20.27 JP12.7
RTS6: IC24.27 JP14.7
RTS7: IC28.27 JP16.7
RX: IC100.P$10 IC101.P$26 JP2.5
RX1: IC5.P$26 IC6.P$10 JP3.5
RX2: IC9.P$26 IC10.P$10 JP5.5
RX3: IC13.P$26 IC14.P$10 JP7.5
RX4: IC17.P$26 IC18.P$10 JP9.5
RX5: IC21.P$26 IC22.P$10 JP11.5
RX6: IC25.P$26 IC26.P$10 JP13.5
RX7: IC29.P$26 IC30.P$10 JP15.5
RXD: IC1.25 JP2.8
RXD1: IC4.25 JP3.8
RXD2: IC8.25 JP5.8
RXD3: IC12.25 JP7.8
RXD4: IC16.25 JP9.8
RXD5: IC20.25 JP11.8
RXD6: IC24.25 JP13.8
RXD7: IC28.25 JP15.8
SCK: IC1.20 JP1.4
SCK1: IC4.20 JP4.4
SCK2: IC8.20 JP6.4
SCK3: IC12.20 JP8.4
SCK4: IC16.20 JP10.4
SCK5: IC20.20 JP12.4
SCK6: IC24.20 JP14.4
SCK7: IC28.20 JP16.4
TX: IC100.P$9 IC101.P$27 JP2.7
TX1: IC5.P$27 IC6.P$9 JP3.7
TX2: IC9.P$27 IC10.P$9 JP5.7
TX3: IC13.P$27 IC14.P$9 JP7.7
TX4: IC17.P$27 IC18.P$9 JP9.7
TX5: IC21.P$27 IC22.P$9 JP11.7
TX6: IC25.P$27 IC26.P$9 JP13.7
TX7: IC29.P$27 IC30.P$9 JP15.7
TXD: IC1.24 JP2.6
TXD1: IC4.24 JP3.6
TXD2: IC8.24 JP5.6
TXD3: IC12.24 JP7.6
TXD4: IC16.24 JP9.6
TXD5: IC20.24 JP11.6
TXD6: IC24.24 JP13.6
TXD7: IC28.24 JP15.6

## Tracks (layer width: path | path; a pad name or v marks a point on that pad's centre or on a via)
12V_DOUT  (via drill 0.61)
  Top 0.254: C1.1 18.39,7.14 | 20.77,5.72 IC2.6 | 7.28,46.04 IC1.1
  Top 0.406: 18.39,7.14 20.14,7.14 20.77,6.51 20.77,5.72 | 7.28,46.04 9.03,46.04 17.12,37.94 17.12,27.15 14.58,24.61 v14.58,21.91 | v18.55,10 18.55,7.46 C1.1 | v34.9,17.78 C4.+
  Bottom 0.254: R107.2 | 25.22,7.62 R105.2 25.22,7.78 | 30.62,10.8 D101.C | 17.6,11.11 17.6,12.7 | 25.22,9.53 25.22,9.68 R106.2 25.22,9.53
  Bottom 0.305: 26.17,12.38 26.01,12.22 26.01,11.59 25.85,11.43
  Bottom 0.406: 25.22,7.62 R107.2 | 25.22,7.78 25.22,9.53 21.89,12.86 19.19,12.86 18,13.73 | v14.58,21.91 14.58,16.67 16.81,14.45 17.52,13.73 18,13.73 | 30.14,10.8 30.62,10.8 | 29.66,10.8 30.14,10.8 | 29.66,10.8 29.66,11.11 | 26.17,12.38 26.33,12.38 28.39,12.38 28.55,12.38 | 25.85,11.43 25.22,10.8 R106.2 | 17.76,10.8 17.6,10.95 17.76,10.8 | v18.55,10 17.76,10.8 | 17.6,12.7 17.6,13.65 18,13.73 | 17.76,10.8 17.6,11.11 | v34.9,17.78 35.06,17.62 35.7,16.99 35.7,16.19 34.43,14.92 29.03,14.92 28.55,14.45 28.55,12.86 28.55,12.38 | 28.55,12.38 28.55,11.91 28.55,11.27 29.03,10.8 29.66,10.8 | 29.66,10.8 30.14,10.8
12V_DOUT1  (via drill 0.61)
  Top 0.254: C7.1 58.39,7.14 | 60.77,5.72 IC3.6 | 47.28,46.04 IC4.1
  Top 0.406: 58.39,7.14 60.14,7.14 60.77,6.51 60.77,5.72 | 47.28,46.04 49.03,46.04 57.12,37.94 57.12,27.15 54.58,24.61 v54.58,21.91 | v58.55,10 58.55,7.46 C7.1 | v74.9,17.78 C10.+
  Bottom 0.254: R6.2 | 65.22,7.62 R16.2 65.22,7.78 | 70.62,10.8 D2.C | 57.6,11.11 57.6,12.7 | 65.22,9.53 65.22,9.68 R5.2 65.22,9.53
  Bottom 0.305: 66.17,12.38 66.01,12.22 66.01,11.59 65.85,11.43
  Bottom 0.406: 65.22,7.62 R6.2 | 65.22,7.78 65.22,9.53 61.89,12.86 59.19,12.86 58,13.73 | v54.58,21.91 54.58,16.67 56.81,14.45 57.52,13.73 58,13.73 | 70.14,10.8 70.62,10.8 | 69.66,10.8 70.14,10.8 | 69.66,10.8 69.66,11.11 | 66.17,12.38 66.33,12.38 68.39,12.38 68.55,12.38 | 65.85,11.43 65.22,10.8 R5.2 | 57.76,10.8 57.6,10.95 57.76,10.8 | v58.55,10 57.76,10.8 | 57.6,12.7 57.6,13.65 58,13.73 | 57.76,10.8 57.6,11.11 | v74.9,17.78 75.06,17.62 75.7,16.99 75.7,16.19 74.43,14.92 69.03,14.92 68.55,14.45 68.55,12.86 68.55,12.38 | 68.55,12.38 68.55,11.91 68.55,11.27 69.03,10.8 69.66,10.8 | 69.66,10.8 70.14,10.8
12V_DOUT2  (via drill 0.61)
  Top 0.254: C12.1 98.39,7.14 | 100.77,5.72 IC7.6 | 87.28,46.04 IC8.1
  Top 0.406: 98.39,7.14 100.14,7.14 100.77,6.51 100.77,5.72 | 87.28,46.04 89.03,46.04 97.12,37.94 97.12,27.15 94.58,24.61 v94.58,21.91 | v98.55,10 98.55,7.46 C12.1 | v114.9,17.78 C15.+
  Bottom 0.254: R21.2 | 105.22,7.62 R31.2 105.22,7.78 | 110.62,10.8 D5.C | 97.6,11.11 97.6,12.7 | 105.22,9.53 105.22,9.68 R20.2 105.22,9.53
  Bottom 0.305: 106.17,12.38 106.01,12.22 106.01,11.59 105.85,11.43
  Bottom 0.406: 105.22,7.62 R21.2 | 105.22,7.78 105.22,9.53 101.89,12.86 99.19,12.86 98,13.73 | v94.58,21.91 94.58,16.67 96.81,14.45 97.52,13.73 98,13.73 | 110.14,10.8 110.62,10.8 | 109.66,10.8 110.14,10.8 | 109.66,10.8 109.66,11.11 | 106.17,12.38 106.33,12.38 108.39,12.38 108.55,12.38 | 105.85,11.43 105.22,10.8 R20.2 | 97.76,10.8 97.6,10.95 97.76,10.8 | v98.55,10 97.76,10.8 | 97.6,12.7 97.6,13.65 98,13.73 | 97.76,10.8 97.6,11.11 | v114.9,17.78 115.06,17.62 115.7,16.99 115.7,16.19 114.43,14.92 109.03,14.92 108.55,14.45 108.55,12.86 108.55,12.38 | 108.55,12.38 108.55,11.91 108.55,11.27 109.03,10.8 109.66,10.8 | 109.66,10.8 110.14,10.8
12V_DOUT3  (via drill 0.61)
  Top 0.254: C17.1 138.39,7.14 | 140.77,5.72 IC11.6 | 127.28,46.04 IC12.1
  Top 0.406: 138.39,7.14 140.14,7.14 140.77,6.51 140.77,5.72 | 127.28,46.04 129.03,46.04 137.12,37.94 137.12,27.15 134.58,24.61 v134.58,21.91 | v138.55,10 138.55,7.46 C17.1 | v154.9,17.78 C20.+
  Bottom 0.254: R36.2 | 145.22,7.62 R46.2 145.22,7.78 | 150.62,10.8 D8.C | 137.6,11.11 137.6,12.7 | 145.22,9.53 145.22,9.68 R35.2 145.22,9.53
  Bottom 0.305: 146.17,12.38 146.01,12.22 146.01,11.59 145.85,11.43
  Bottom 0.406: 145.22,7.62 R36.2 | 145.22,7.78 145.22,9.53 141.89,12.86 139.19,12.86 138,13.73 | v134.58,21.91 134.58,16.67 136.81,14.45 137.52,13.73 138,13.73 | 150.14,10.8 150.62,10.8 | 149.66,10.8 150.14,10.8 | 149.66,10.8 149.66,11.11 | 146.17,12.38 146.33,12.38 148.39,12.38 148.55,12.38 | 145.85,11.43 145.22,10.8 R35.2 | 137.76,10.8 137.6,10.95 137.76,10.8 | v138.55,10 137.76,10.8 | 137.6,12.7 137.6,13.65 138,13.73 | 137.76,10.8 137.6,11.11 | v154.9,17.78 155.06,17.62 155.7,16.99 155.7,16.19 154.43,14.92 149.03,14.92 148.55,14.45 148.55,12.86 148.55,12.38 | 148.55,12.38 148.55,11.91 148.55,11.27 149.03,10.8 149.66,10.8 | 149.66,10.8 150.14,10.8
12V_DOUT4  (via drill 0.61)
  Top 0.254: C22.1 18.39,57.14 | 20.77,55.72 IC15.6 | 7.28,96.04 IC16.1
  Top 0.406: 18.39,57.14 20.14,57.14 20.77,56.51 20.77,55.72 | 7.28,96.04 9.03,96.04 17.12,87.94 17.12,77.15 14.58,74.61 v14.58,71.91 | v18.55,60 18.55,57.46 C22.1 | v34.9,67.78 C25.+
  Bottom 0.254: R51.2 | 25.22,57.62 R61.2 25.22,57.78 | 30.62,60.8 D11.C | 17.6,61.11 17.6,62.7 | 25.22,59.53 25.22,59.68 R50.2 25.22,59.53
  Bottom 0.305: 26.17,62.38 26.01,62.22 26.01,61.59 25.85,61.43
  Bottom 0.406: 25.22,57.62 R51.2 | 25.22,57.78 25.22,59.53 21.89,62.86 19.19,62.86 18,63.73 | v14.58,71.91 14.58,66.67 16.81,64.45 17.52,63.73 18,63.73 | 30.14,60.8 30.62,60.8 | 29.66,60.8 30.14,60.8 | 29.66,60.8 29.66,61.11 | 26.17,62.38 26.33,62.38 28.39,62.38 28.55,62.38 | 25.85,61.43 25.22,60.8 R50.2 | 17.76,60.8 17.6,60.95 17.76,60.8 | v18.55,60 17.76,60.8 | 17.6,62.7 17.6,63.65 18,63.73 | 17.76,60.8 17.6,61.11 | v34.9,67.78 35.06,67.62 35.7,66.99 35.7,66.19 34.43,64.92 29.03,64.92 28.55,64.45 28.55,62.86 28.55,62.38 | 28.55,62.38 28.55,61.91 28.55,61.27 29.03,60.8 29.66,60.8 | 29.66,60.8 30.14,60.8
12V_DOUT5  (via drill 0.61)
  Top 0.254: C27.1 58.39,57.14 | 60.77,55.72 IC19.6 | 47.28,96.04 IC20.1
  Top 0.406: 58.39,57.14 60.14,57.14 60.77,56.51 60.77,55.72 | 47.28,96.04 49.03,96.04 57.12,87.94 57.12,77.15 54.58,74.61 v54.58,71.91 | v58.55,60 58.55,57.46 C27.1 | v74.9,67.78 C30.+
  Bottom 0.254: R66.2 | 65.22,57.62 R76.2 65.22,57.78 | 70.62,60.8 D14.C | 57.6,61.11 57.6,62.7 | 65.22,59.53 65.22,59.68 R65.2 65.22,59.53
  Bottom 0.305: 66.17,62.38 66.01,62.22 66.01,61.59 65.85,61.43
  Bottom 0.406: 65.22,57.62 R66.2 | 65.22,57.78 65.22,59.53 61.89,62.86 59.19,62.86 58,63.73 | v54.58,71.91 54.58,66.67 56.81,64.45 57.52,63.73 58,63.73 | 70.14,60.8 70.62,60.8 | 69.66,60.8 70.14,60.8 | 69.66,60.8 69.66,61.11 | 66.17,62.38 66.33,62.38 68.39,62.38 68.55,62.38 | 65.85,61.43 65.22,60.8 R65.2 | 57.76,60.8 57.6,60.95 57.76,60.8 | v58.55,60 57.76,60.8 | 57.6,62.7 57.6,63.65 58,63.73 | 57.76,60.8 57.6,61.11 | v74.9,67.78 75.06,67.62 75.7,66.99 75.7,66.19 74.43,64.92 69.03,64.92 68.55,64.45 68.55,62.86 68.55,62.38 | 68.55,62.38 68.55,61.91 68.55,61.27 69.03,60.8 69.66,60.8 | 69.66,60.8 70.14,60.8
12V_DOUT6  (via drill 0.61)
  Top 0.254: C32.1 98.39,57.14 | 100.77,55.72 IC23.6 | 87.28,96.04 IC24.1
  Top 0.406: 98.39,57.14 100.14,57.14 100.77,56.51 100.77,55.72 | 87.28,96.04 89.03,96.04 97.12,87.94 97.12,77.15 94.58,74.61 v94.58,71.91 | v98.55,60 98.55,57.46 C32.1 | v114.9,67.78 C35.+
  Bottom 0.254: R81.2 | 105.22,57.62 R91.2 105.22,57.78 | 110.62,60.8 D17.C | 97.6,61.11 97.6,62.7 | 105.22,59.53 105.22,59.68 R80.2 105.22,59.53
  Bottom 0.305: 106.17,62.38 106.01,62.22 106.01,61.59 105.85,61.43
  Bottom 0.406: 105.22,57.62 R81.2 | 105.22,57.78 105.22,59.53 101.89,62.86 99.19,62.86 98,63.73 | v94.58,71.91 94.58,66.67 96.81,64.45 97.52,63.73 98,63.73 | 110.14,60.8 110.62,60.8 | 109.66,60.8 110.14,60.8 | 109.66,60.8 109.66,61.11 | 106.17,62.38 106.33,62.38 108.39,62.38 108.55,62.38 | 105.85,61.43 105.22,60.8 R80.2 | 97.76,60.8 97.6,60.95 97.76,60.8 | v98.55,60 97.76,60.8 | 97.6,62.7 97.6,63.65 98,63.73 | 97.76,60.8 97.6,61.11 | v114.9,67.78 115.06,67.62 115.7,66.99 115.7,66.19 114.43,64.92 109.03,64.92 108.55,64.45 108.55,62.86 108.55,62.38 | 108.55,62.38 108.55,61.91 108.55,61.27 109.03,60.8 109.66,60.8 | 109.66,60.8 110.14,60.8
12V_DOUT7  (via drill 0.61)
  Top 0.254: C37.1 138.39,57.14 | 140.77,55.72 IC27.6 | 127.28,96.04 IC28.1
  Top 0.406: 138.39,57.14 140.14,57.14 140.77,56.51 140.77,55.72 | 127.28,96.04 129.03,96.04 137.12,87.94 137.12,77.15 134.58,74.61 v134.58,71.91 | v138.55,60 138.55,57.46 C37.1 | v154.9,67.78 C40.+
  Bottom 0.254: R96.2 | 145.22,57.62 R117.2 145.22,57.78 | 150.62,60.8 D20.C | 137.6,61.11 137.6,62.7 | 145.22,59.53 145.22,59.68 R95.2 145.22,59.53
  Bottom 0.305: 146.17,62.38 146.01,62.22 146.01,61.59 145.85,61.43
  Bottom 0.406: 145.22,57.62 R96.2 | 145.22,57.78 145.22,59.53 141.89,62.86 139.19,62.86 138,63.73 | v134.58,71.91 134.58,66.67 136.81,64.45 137.52,63.73 138,63.73 | 150.14,60.8 150.62,60.8 | 149.66,60.8 150.14,60.8 | 149.66,60.8 149.66,61.11 | 146.17,62.38 146.33,62.38 148.39,62.38 148.55,62.38 | 145.85,61.43 145.22,60.8 R95.2 | 137.76,60.8 137.6,60.95 137.76,60.8 | v138.55,60 137.76,60.8 | 137.6,62.7 137.6,63.65 138,63.73 | 137.76,60.8 137.6,61.11 | v154.9,67.78 155.06,67.62 155.7,66.99 155.7,66.19 154.43,64.92 149.03,64.92 148.55,64.45 148.55,62.86 148.55,62.38 | 148.55,62.38 148.55,61.91 148.55,61.27 149.03,60.8 149.66,60.8 | 149.66,60.8 150.14,60.8
+3V1  (via drill 0.61)
  Top 0.254: 42.04,11.59 42.2,11.43 SG2.(+)LEAD | 47.12,21.27 IC4.14 | L4.P$1 52.36,11.91 | 59.5,19.53 v59.66,19.53
  Top 0.406: 47.12,21.27 46.01,21.27 42.99,21.27 42.04,20.32 42.04,19.84 42.04,15.88 42.04,15.4 42.04,13.97 | 42.04,11.59 42.04,13.97 | L4.P$1 51.73,12.07 v49.82,13.97 48.71,13.97 47.76,13.97 45.38,13.97 | 52.36,11.91 54.74,9.53 54.74,9.37 L3.1 | 42.04,13.97 45.38,13.97 | v66.01,41.59 66.01,42.7 66.49,43.18 69.51,43.18 70.78,44.45 JP3.1 | 67.12,12.07 67.44,12.07 | 67.76,12.38 C9.+ | 67.44,12.07 67.76,12.38 | 67.12,12.07 C6.1 | 67.76,12.38 | 67.44,12.07 67.76,12.38 | 67.44,12.07 67.12,11.75 67.12,12.07 | 67.12,12.07 67.12,13.34 66.49,13.97 63,17.46 59.19,17.46 | v65.06,36.83 65.06,35.24 v63.47,33.66 | 45.38,13.97 45.38,16.03 45.85,16.51 49.66,16.51 50.61,15.56 51.57,15.56 52.2,15.56 55.06,15.56 56.96,17.46 | 59.5,19.53 59.03,19.53 56.96,17.46 | 59.19,17.46 | 56.96,17.46 59.19,17.46
  Bottom 0.254: 49.82,17.62 IC6.P$16 | 67.44,20.32 IC5.P$17 | IC5.P$2 67.44,40.64
  Bottom 0.406: R8.2 56.49,5.87 56.49,7.46 54.74,9.21 L3.1 | v49.82,13.97 49.82,17.62 | 66.33,40.64 66.01,40.96 v66.01,41.59 | 66.33,40.64 IC5.P$2 | 67.44,20.32 66.97,20.32 65.7,19.05 IC6.P$14 64.9,18.89 64.74,19.05 63.31,19.05 60.62,19.05 59.98,19.53 v59.66,19.53 59.66,23.34 60.93,24.61 60.93,31.12 60.93,32.23 62.36,33.66 v63.47,33.66 | 66.33,40.64 66.49,40.64 65.06,39.21 v65.06,36.83 | 66.33,40.64 67.44,40.64
+3V2  (via drill 0.61)
  Top 0.254: 82.04,11.59 82.2,11.43 SG3.(+)LEAD | 87.12,21.27 IC8.14 | L6.P$1 92.36,11.91 | 99.5,19.53 v99.66,19.53
  Top 0.406: 87.12,21.27 86.01,21.27 82.99,21.27 82.04,20.32 82.04,19.84 82.04,15.88 82.04,15.4 82.04,13.97 | 82.04,11.59 82.04,13.97 | L6.P$1 91.73,12.07 v89.82,13.97 88.71,13.97 87.76,13.97 85.38,13.97 | 92.36,11.91 94.74,9.53 94.74,9.37 L5.1 | 82.04,13.97 85.38,13.97 | v106.01,41.59 106.01,42.7 106.49,43.18 109.51,43.18 110.78,44.45 JP5.1 | 107.12,12.07 107.44,12.07 | 107.76,12.38 C14.+ | 107.44,12.07 107.76,12.38 | 107.12,12.07 C11.1 | 107.76,12.38 | 107.44,12.07 107.76,12.38 | 107.44,12.07 107.12,11.75 107.12,12.07 | 107.12,12.07 107.12,13.34 106.49,13.97 103,17.46 99.19,17.46 | v105.06,36.83 105.06,35.24 v103.47,33.66 | 85.38,13.97 85.38,16.03 85.85,16.51 89.66,16.51 90.61,15.56 91.57,15.56 92.2,15.56 95.06,15.56 96.96,17.46 | 99.5,19.53 99.03,19.53 96.96,17.46 | 99.19,17.46 | 96.96,17.46 99.19,17.46
  Bottom 0.254: 89.82,17.62 IC10.P$16 | 107.44,20.32 IC9.P$17 | IC9.P$2 107.44,40.64
  Bottom 0.406: R23.2 96.49,5.87 96.49,7.46 94.74,9.21 L5.1 | v89.82,13.97 89.82,17.62 | 106.33,40.64 106.01,40.96 v106.01,41.59 | 106.33,40.64 IC9.P$2 | 107.44,20.32 106.97,20.32 105.7,19.05 IC10.P$14 104.9,18.89 104.74,19.05 103.31,19.05 100.62,19.05 99.98,19.53 v99.66,19.53 99.66,23.34 100.93,24.61 100.93,31.12 100.93,32.23 102.36,33.66 v103.47,33.66 | 106.33,40.64 106.49,40.64 105.06,39.21 v105.06,36.83 | 106.33,40.64 107.44,40.64
+3V3  (via drill 0.61)
  Top 0.254: 2.04,11.59 2.2,11.43 SG1.(+)LEAD | 7.12,21.27 IC1.14 | L2.P$1 12.36,11.91 | 19.5,19.53 v19.66,19.53
  Top 0.406: 7.12,21.27 6.01,21.27 2.99,21.27 2.04,20.32 2.04,19.84 2.04,15.88 2.04,15.4 2.04,13.97 | 2.04,11.59 2.04,13.97 | L2.P$1 11.73,12.07 v9.82,13.97 8.71,13.97 7.76,13.97 5.38,13.97 | 12.36,11.91 14.74,9.53 14.74,9.37 L1.1 | 2.04,13.97 5.38,13.97 | v26.01,41.59 26.01,42.7 26.49,43.18 29.51,43.18 30.78,44.45 JP2.1 | 27.12,12.07 27.44,12.07 | 27.76,12.38 C5.+ | 27.44,12.07 27.76,12.38 | 27.12,12.07 C2.1 | 27.76,12.38 | 27.44,12.07 27.76,12.38 | 27.44,12.07 27.12,11.75 27.12,12.07 | 27.12,12.07 27.12,13.34 26.49,13.97 23,17.46 19.19,17.46 | v25.06,36.83 25.06,35.24 v23.47,33.66 | 5.38,13.97 5.38,16.03 5.85,16.51 9.66,16.51 10.61,15.56 11.57,15.56 12.2,15.56 15.06,15.56 16.96,17.46 | 19.5,19.53 19.03,19.53 16.96,17.46 | 19.19,17.46 | 16.96,17.46 19.19,17.46
  Bottom 0.254: 9.82,17.62 IC100.P$16 | 27.44,20.32 IC101.P$17 | IC101.P$2 27.44,40.64
  Bottom 0.406: R103.2 16.49,5.87 16.49,7.46 14.74,9.21 L1.1 | v9.82,13.97 9.82,17.62 | 26.33,40.64 26.01,40.96 v26.01,41.59 | 26.33,40.64 IC101.P$2 | 27.44,20.32 26.97,20.32 25.7,19.05 IC100.P$14 24.9,18.89 24.74,19.05 23.31,19.05 20.62,19.05 19.98,19.53 v19.66,19.53 19.66,23.34 20.93,24.61 20.93,31.12 20.93,32.23 22.36,33.66 v23.47,33.66 | 26.33,40.64 26.49,40.64 25.06,39.21 v25.06,36.83 | 26.33,40.64 27.44,40.64
+3V4  (via drill 0.61)
  Top 0.254: 122.04,11.59 122.2,11.43 SG4.(+)LEAD | 127.12,21.27 IC12.14 | L8.P$1 132.36,11.91 | 139.5,19.53 v139.66,19.53
  Top 0.406: 127.12,21.27 126.01,21.27 122.99,21.27 122.04,20.32 122.04,19.84 122.04,15.88 122.04,15.4 122.04,13.97 | 122.04,11.59 122.04,13.97 | L8.P$1 131.73,12.07 v129.82,13.97 128.71,13.97 127.76,13.97 125.38,13.97 | 132.36,11.91 134.74,9.53 134.74,9.37 L7.1 | 122.04,13.97 125.38,13.97 | v146.01,41.59 146.01,42.7 146.49,43.18 149.51,43.18 150.78,44.45 JP7.1 | 147.12,12.07 147.44,12.07 | 147.76,12.38 C19.+ | 147.44,12.07 147.76,12.38 | 147.12,12.07 C16.1 | 147.76,12.38 | 147.44,12.07 147.76,12.38 | 147.44,12.07 147.12,11.75 147.12,12.07 | 147.12,12.07 147.12,13.34 146.49,13.97 143,17.46 139.19,17.46 | v145.06,36.83 145.06,35.24 v143.47,33.66 | 125.38,13.97 125.38,16.03 125.85,16.51 129.66,16.51 130.61,15.56 131.57,15.56 132.2,15.56 135.06,15.56 136.96,17.46 | 139.5,19.53 139.03,19.53 136.96,17.46 | 139.19,17.46 | 136.96,17.46 139.19,17.46
  Bottom 0.254: 129.82,17.62 IC14.P$16 | 147.44,20.32 IC13.P$17 | IC13.P$2 147.44,40.64
  Bottom 0.406: R38.2 136.49,5.87 136.49,7.46 134.74,9.21 L7.1 | v129.82,13.97 129.82,17.62 | 146.33,40.64 146.01,40.96 v146.01,41.59 | 146.33,40.64 IC13.P$2 | 147.44,20.32 146.97,20.32 145.7,19.05 IC14.P$14 144.9,18.89 144.74,19.05 143.31,19.05 140.62,19.05 139.98,19.53 v139.66,19.53 139.66,23.34 140.93,24.61 140.93,31.12 140.93,32.23 142.36,33.66 v143.47,33.66 | 146.33,40.64 146.49,40.64 145.06,39.21 v145.06,36.83 | 146.33,40.64 147.44,40.64
+3V5  (via drill 0.61)
  Top 0.254: 2.04,61.59 2.2,61.43 SG5.(+)LEAD | 7.12,71.27 IC16.14 | L10.P$1 12.36,61.91 | 19.5,69.53 v19.66,69.53
  Top 0.406: 7.12,71.27 6.01,71.27 2.99,71.27 2.04,70.32 2.04,69.84 2.04,65.88 2.04,65.4 2.04,63.97 | 2.04,61.59 2.04,63.97 | L10.P$1 11.73,62.07 v9.82,63.97 8.71,63.97 7.76,63.97 5.38,63.97 | 12.36,61.91 14.74,59.53 14.74,59.37 L9.1 | 2.04,63.97 5.38,63.97 | v26.01,91.59 26.01,92.7 26.49,93.18 29.51,93.18 30.78,94.45 JP9.1 | 27.12,62.07 27.44,62.07 | 27.76,62.38 C24.+ | 27.44,62.07 27.76,62.38 | 27.12,62.07 C21.1 | 27.76,62.38 | 27.44,62.07 27.76,62.38 | 27.44,62.07 27.12,61.75 27.12,62.07 | 27.12,62.07 27.12,63.34 26.49,63.97 23,67.46 19.19,67.46 | v25.06,86.83 25.06,85.24 v23.47,83.66 | 5.38,63.97 5.38,66.03 5.85,66.51 9.66,66.51 10.61,65.56 11.57,65.56 12.2,65.56 15.06,65.56 16.96,67.46 | 19.5,69.53 19.03,69.53 16.96,67.46 | 19.19,67.46 | 16.96,67.46 19.19,67.46
  Bottom 0.254: 9.82,67.62 IC18.P$16 | 27.44,70.32 IC17.P$17 | IC17.P$2 27.44,90.64
  Bottom 0.406: R53.2 16.49,55.87 16.49,57.46 14.74,59.21 L9.1 | v9.82,63.97 9.82,67.62 | 26.33,90.64 26.01,90.96 v26.01,91.59 | 26.33,90.64 IC17.P$2 | 27.44,70.32 26.97,70.32 25.7,69.05 IC18.P$14 24.9,68.89 24.74,69.05 23.31,69.05 20.62,69.05 19.98,69.53 v19.66,69.53 19.66,73.34 20.93,74.61 20.93,81.12 20.93,82.23 22.36,83.66 v23.47,83.66 | 26.33,90.64 26.49,90.64 25.06,89.21 v25.06,86.83 | 26.33,90.64 27.44,90.64
+3V6  (via drill 0.61)
  Top 0.254: 42.04,61.59 42.2,61.43 SG6.(+)LEAD | 47.12,71.27 IC20.14 | L12.P$1 52.36,61.91 | 59.5,69.53 v59.66,69.53
  Top 0.406: 47.12,71.27 46.01,71.27 42.99,71.27 42.04,70.32 42.04,69.84 42.04,65.88 42.04,65.4 42.04,63.97 | 42.04,61.59 42.04,63.97 | L12.P$1 51.73,62.07 v49.82,63.97 48.71,63.97 47.76,63.97 45.38,63.97 | 52.36,61.91 54.74,59.53 54.74,59.37 L11.1 | 42.04,63.97 45.38,63.97 | v66.01,91.59 66.01,92.7 66.49,93.18 69.51,93.18 70.78,94.45 JP11.1 | 67.12,62.07 67.44,62.07 | 67.76,62.38 C29.+ | 67.44,62.07 67.76,62.38 | 67.12,62.07 C26.1 | 67.76,62.38 | 67.44,62.07 67.76,62.38 | 67.44,62.07 67.12,61.75 67.12,62.07 | 67.12,62.07 67.12,63.34 66.49,63.97 63,67.46 59.19,67.46 | v65.06,86.83 65.06,85.24 v63.47,83.66 | 45.38,63.97 45.38,66.03 45.85,66.51 49.66,66.51 50.61,65.56 51.57,65.56 52.2,65.56 55.06,65.56 56.96,67.46 | 59.5,69.53 59.03,69.53 56.96,67.46 | 59.19,67.46 | 56.96,67.46 59.19,67.46
  Bottom 0.254: 49.82,67.62 IC22.P$16 | 67.44,70.32 IC21.P$17 | IC21.P$2 67.44,90.64
  Bottom 0.406: R68.2 56.49,55.87 56.49,57.46 54.74,59.21 L11.1 | v49.82,63.97 49.82,67.62 | 66.33,90.64 66.01,90.96 v66.01,91.59 | 66.33,90.64 IC21.P$2 | 67.44,70.32 66.97,70.32 65.7,69.05 IC22.P$14 64.9,68.89 64.74,69.05 63.31,69.05 60.62,69.05 59.98,69.53 v59.66,69.53 59.66,73.34 60.93,74.61 60.93,81.12 60.93,82.23 62.36,83.66 v63.47,83.66 | 66.33,90.64 66.49,90.64 65.06,89.21 v65.06,86.83 | 66.33,90.64 67.44,90.64
+3V7  (via drill 0.61)
  Top 0.254: 82.04,61.59 82.2,61.43 SG7.(+)LEAD | 87.12,71.27 IC24.14 | L14.P$1 92.36,61.91 | 99.5,69.53 v99.66,69.53
  Top 0.406: 87.12,71.27 86.01,71.27 82.99,71.27 82.04,70.32 82.04,69.84 82.04,65.88 82.04,65.4 82.04,63.97 | 82.04,61.59 82.04,63.97 | L14.P$1 91.73,62.07 v89.82,63.97 88.71,63.97 87.76,63.97 85.38,63.97 | 92.36,61.91 94.74,59.53 94.74,59.37 L13.1 | 82.04,63.97 85.38,63.97 | v106.01,91.59 106.01,92.7 106.49,93.18 109.51,93.18 110.78,94.45 JP13.1 | 107.12,62.07 107.44,62.07 | 107.76,62.38 C34.+ | 107.44,62.07 107.76,62.38 | 107.12,62.07 C31.1 | 107.76,62.38 | 107.44,62.07 107.76,62.38 | 107.44,62.07 107.12,61.75 107.12,62.07 | 107.12,62.07 107.12,63.34 106.49,63.97 103,67.46 99.19,67.46 | v105.06,86.83 105.06,85.24 v103.47,83.66 | 85.38,63.97 85.38,66.03 85.85,66.51 89.66,66.51 90.61,65.56 91.57,65.56 92.2,65.56 95.06,65.56 96.96,67.46 | 99.5,69.53 99.03,69.53 96.96,67.46 | 99.19,67.46 | 96.96,67.46 99.19,67.46